# Altium PCB T-Type Converter.PcbDoc (part 4 of 4)
Units mil, origin at the board's own origin, x right, y up, seen from the top; angles counter-clockwise.
Board outline 14649.61 x 8960.63 mil, 2 copper layers (Top Layer, Bottom Layer), stack 64.8 mil thick; 214 components, 130 nets, 860 pads, 57 vias.
Unrouted connection lines stored in the file: 20.
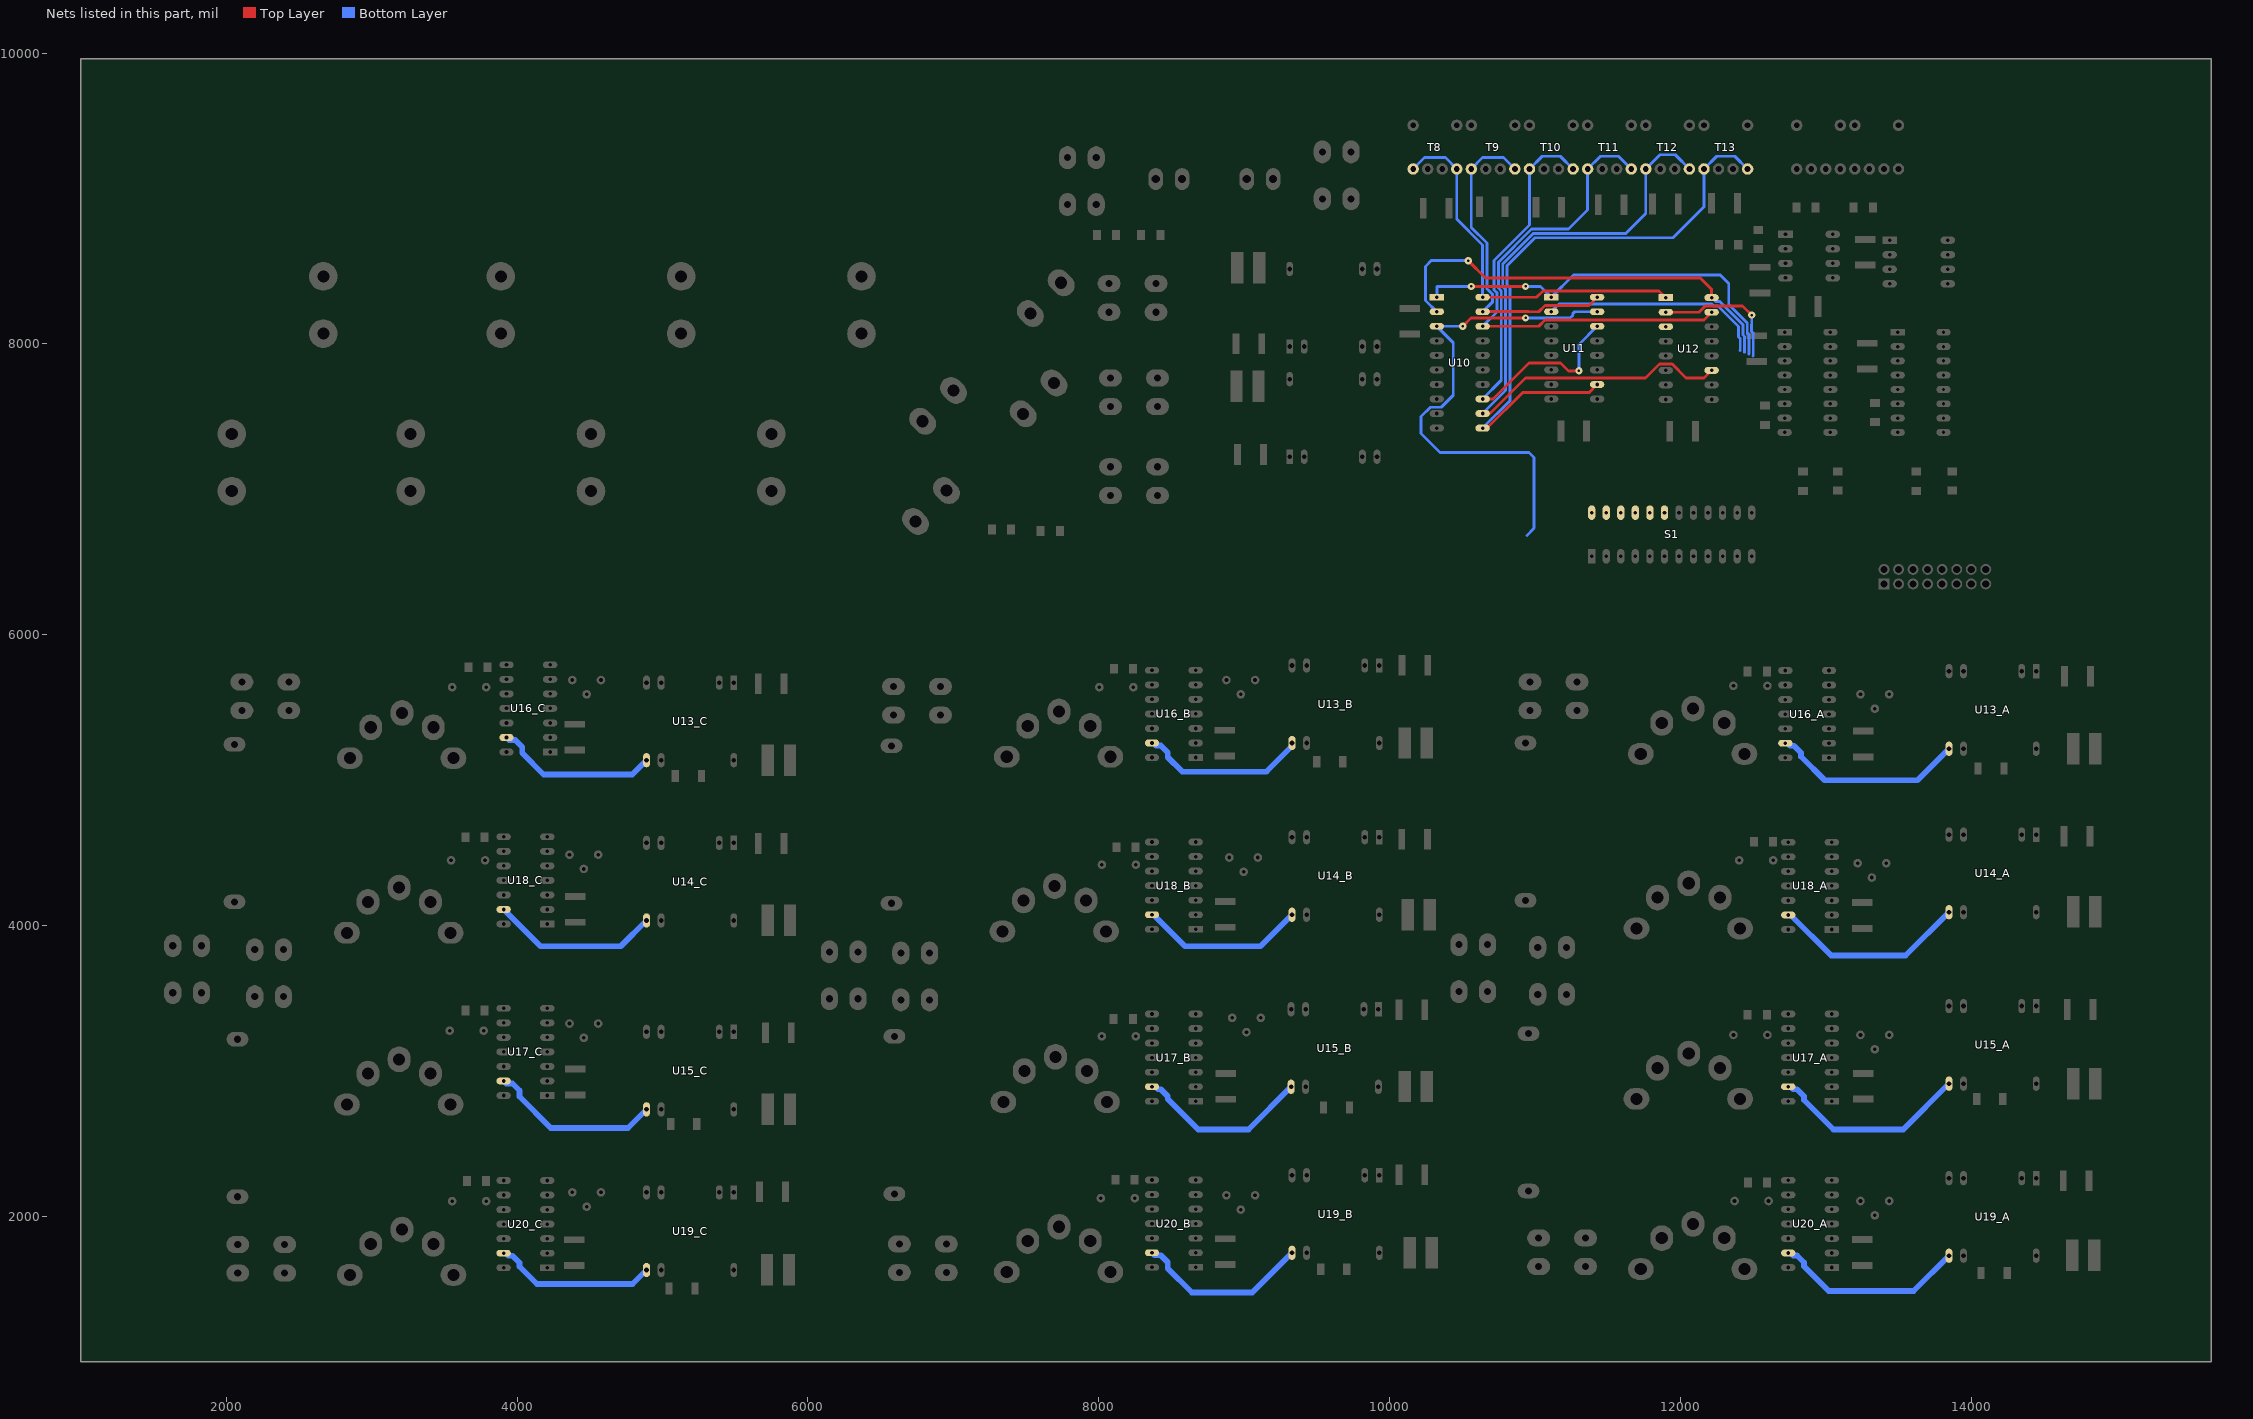
[diagram p3: the nets of this part, all layers, seen from the top]

## Via types
v1: diameter 50, hole 17, Top Layer to Bottom Layer, 25 vias
v2: diameter 80, hole 39, Top Layer to Bottom Layer, 17 vias
v3: diameter 50, hole 25, Top Layer to Bottom Layer, 13 vias
v4: diameter 50, hole 28, Top Layer to Bottom Layer, 2 vias

## Nets (pads, with @x,y where several pads share a name; then routed paths per layer and width w, separated by ;. In a path a pad name is that pad's centre, name@x,y a point inside that pad or via, vN(x,y) a via of type N, cw(c..) or ccw(c..) an arc to the next point about the centre after c; other vN are vias at no path point) (continued)
NetS1_19: S1.19 U10.3 U11.15 | length 3473.2
  Top Layer w19.68: v1(10503.54,8121.65) 10560.08,8178.19 10683.36,8178.19 10684.3,8179.13 v1(10935.04,8179.13)
  Bottom Layer w19.68: v1(10503.54,8121.65) U10.3@10324.8,8121.65 10437.85,8008.61 10437.85,7647.64 10355.33,7565.12 10281.21,7565.12 10216.69,7500.6 10216.69,7384.34 10347.41,7253.62 10958.98,7253.62 10993.11,7219.49 10993.11,7022.99 10994.09,7022 10994.09,6733.27 10943.9,6683.07 ; v1(10935.04,8179.13) 10935.98,8178.19 11241.67,8178.19 11259.05,8195.58 11259.05,8207.87 11272.83,8221.65 U11.15@11427.17,8221.65
NetS1_20: S1.20 U12.3
NetS1_21: S1.21 U11.2 | length 1563.6
  Bottom Layer w19.68: U11.2@11125.98,8207.87 U11.2@11112.2,8221.65 11165.59,8275.04 12216.05,8275.04 12229.12,8261.97 12258.16,8261.97 12400.32,8119.81 12400.32,8048.56 12411.42,8037.46 12411.42,7956.64 12410.16,7955.38
NetS1_22: S1.22 U10.2 U12.16 | length 2957.8
  Top Layer w19.68: v1(10541.34,8572.83) 10659.45,8454.72 12135.83,8454.72 12214.57,8375.99 U12.16@12214.57,8318.5 U12.16@12216.14,8316.93
  Bottom Layer w19.68: U10.2@10324.8,8221.65 10323.91,8221.65 10246.06,8299.5 10246.06,8533.46 10285.43,8572.83 v1(10541.34,8572.83) ; U12.16@12214.57,8318.5 12241.42,8291.65 12270.46,8291.65 12430,8132.11 12430,8060.86 12441.1,8049.75 12441.1,7944.34 12439.84,7943.08
NetS1_23: S1.23 U10.1 U11.1 | length 2742.6
  Top Layer w19.68: v1(10561.02,8395.67) v1(10935.04,8395.67)
  Bottom Layer w19.68: U10.1@10324.8,8321.65 10324.8,8395.67 v1(10561.02,8395.67) ; v1(10935.04,8395.67) 11038.19,8395.67 U11.1@11112.2,8321.65 11264.96,8474.41 12273.62,8474.41 12332.68,8415.35 12332.68,8271.41 12459.69,8144.41 12459.69,8073.15 12470.79,8062.05 12470.79,7932.04 12469.53,7930.78
NetS1_24: S1.24 U12.2 | length 920.5
  Top Layer w19.68: U12.2@11899.61,8218.5 12127.51,8218.5 12170.97,8261.97 12427.01,8261.97 v1(12490.16,8198.82)
  Bottom Layer w19.68: v1(12490.16,8198.82) 12490.16,8135.81 12489.37,8135.02 12489.37,8085.45 12500.47,8074.35 12500.47,7919.75 12499.21,7918.49
NetT8_1: T8.1 T8.4 U10.20 U12.1 | length 2617.3
  Top Layer w19.68: U10.20@10639.76,8321.65 11011.31,8321.65 11054.77,8365.12 11852.99,8365.12 U12.1@11899.61,8318.5
  Bottom Layer w19.68: T8.1@10161.81,9203.54 10239.76,9281.5 10383.86,9281.5 T8.4@10461.81,9203.54 10461.81,8859.06 10639.76,8681.1 U10.20@10639.76,8321.65
NetT9_1: T9.1 T9.4 U10.19 U11.16 | length 2291.1
  Top Layer w19.68: U10.19@10639.76,8221.65 10642.09,8223.98 10953.61,8223.98 10955.94,8221.65 11025.15,8221.65 11068.61,8265.12 11370.63,8265.12 U11.16@11427.17,8321.65
  Bottom Layer w19.68: U10.19@10639.76,8221.65 10708.82,8290.71 10708.82,8339.66 10679.13,8369.34 10669.45,8379.03 10669.45,8693.4 10561.81,8801.04 T9.1@10561.81,9203.54 10639.76,9281.5 10783.86,9281.5 T9.4@10861.81,9203.54 ; U11.16@11402.76,8321.65 U11.16@11427.17,8321.65
NetT10_1: T10.1 T10.4 U10.18 U12.15 | length 3219.5
  Top Layer w19.68: U10.18@10639.76,8121.65 11025.15,8121.65 11068.61,8165.12 12161.18,8165.12 U12.15@12214.57,8218.5
  Bottom Layer w19.68: U10.18@10639.76,8121.65 10738.5,8220.39 10738.5,8351.95 10718.5,8371.95 10718.5,8574.41 10961.81,8817.72 T10.1@10961.81,9203.54 11049.61,9291.34 11174.02,9291.34 T10.4@11261.81,9203.54
NetT11_1: T11.1 T11.4 U10.13 U11.14 | length 3564.5
  Top Layer w19.68: U10.13@10639.76,7621.65 10712.2,7621.65 10958.66,7868.11 11176.18,7868.11 11229.33,7814.96 v1(11302.17,7814.96)
  Bottom Layer w19.68: U10.13@10639.76,7621.65 10768.19,7750.08 10768.19,8364.25 10748.19,8384.25 10748.19,8537.52 10748.19,8562.11 10975.6,8789.53 11230.47,8789.53 11361.81,8920.87 T11.1@11361.81,9203.54 11449.61,9291.34 11574.02,9291.34 T11.4@11661.81,9203.54 ; v1(11302.17,7814.96) 11302.17,7996.65 U11.14@11427.17,8121.65
NetT12_1: T12.1 T12.4 U10.12 U12.11 | length 4694.2
  Top Layer w19.68: U10.12@10639.76,7521.65 10690.94,7521.65 10935.04,7765.75 11759.79,7765.75 11856.01,7861.97 11943.2,7861.97 12039.42,7765.75 12161.81,7765.75 U12.11@12214.57,7818.5
  Bottom Layer w19.68: U10.12@10639.76,7521.65 10797.87,7679.76 10797.87,8376.54 10777.87,8396.54 10777.87,8549.82 10987.9,8759.84 11624.02,8759.84 11761.81,8897.64 T12.1@11761.81,9203.54 11859.45,9301.18 11964.17,9301.18 T12.4@12061.81,9203.54
NetT13_1: T13.1 T13.4 U10.11 U11.10 | length 4268.9
  Top Layer w19.68: U10.11@10639.76,7421.65 10669.69,7421.65 10915.35,7667.32 11372.84,7667.32 U11.10@11427.17,7721.65
  Bottom Layer w19.68: U10.11@10639.76,7421.65 10827.56,7609.45 10827.56,8388.84 10807.56,8408.84 10807.56,8537.52 11000.19,8730.16 11948.66,8730.16 12161.81,8943.31 T13.1@12161.81,9203.54 12249.61,9291.34 12374.02,9291.34 T13.4@12461.81,9203.54
NetU13_A_8: U13_A.8 U16_A.13 | length 1335.7
  Bottom Layer w39.37: U16_A.13@12721.65,5254.33 12737.79,5254.33 12755.12,5237.01 12781.49,5237.01 12829.92,5188.58 12829.92,5162.2 12992.13,5000 13630.31,5000 U13_A.8@13846.85,5216.54
NetU13_B_8: U13_B.8 U16_B.13 | length 1157.1
  Bottom Layer w39.37: U16_B.13@8366.14,5255.91 8376.97,5255.91 8394.29,5238.58 8425.98,5238.58 8474.41,5190.15 8474.41,5158.46 8573.82,5059.06 9153.54,5059.06 9329.13,5234.65 U13_B.8@9329.13,5255.91
NetU13_C_8: U13_C.8 U16_C.13 | length 1132.5
  Bottom Layer w39.37: U16_C.13@3928.14,5293.7 3945.47,5276.38 3987,5276.38 4035.43,5227.95 4035.43,5186.41 4182.47,5039.37 4791.73,5039.37 U13_C.8@4890.16,5137.8
NetU14_A_8: U14_A.8 U18_A.13 | length 1344.9
  Bottom Layer w39.37: U18_A.13@12741.34,4073.23 12757.48,4073.23 13036.82,3793.89 13548.22,3793.89 U14_A.8@13846.85,4092.52
NetU14_B_8: U14_B.8 U18_B.13 | length 1142.4
  Bottom Layer w39.37: U18_B.13@8366.14,4074.8 8376.97,4074.8 8593.5,3858.27 9112.6,3858.27 U14_B.8@9329.13,4074.8
NetU14_C_8: U14_C.8 U18_C.13 | length 1159.8
  Bottom Layer w39.37: U18_C.13@3908.46,4111.02 4161.21,3858.27 4712.99,3858.27 U14_C.8@4890.16,4035.43
NetU15_A_8: U15_A.8 U17_A.13 | length 1372.5
  Bottom Layer w39.37: U17_A.13@12741.34,2892.13 12758.46,2892.13 12775.79,2874.8 12801.18,2874.8 12849.61,2826.37 12849.61,2800.98 13052.16,2598.43 13531.89,2598.43 U15_A.8@13846.85,2913.39
NetU15_B_8: U15_B.8 U17_B.13 | length 1210.6
  Bottom Layer w39.37: U17_B.13@8366.14,2892.13 8390.35,2892.13 8407.68,2874.8 8425.98,2874.8 8474.41,2826.37 8474.41,2808.07 8684.05,2598.43 9029.53,2598.43 U15_B.8@9322.83,2891.73
NetU15_C_8: U15_C.8 U17_C.13 | length 1192.9
  Bottom Layer w39.37: U17_C.13@3908.46,2931.5 3925.78,2914.17 3967.32,2914.17 4015.75,2865.74 4015.75,2824.21 4231.69,2608.27 4762.2,2608.27 U15_C.8@4890.16,2736.22
NetU19_A_8: U19_A.8 U20_A.13 | length 1329.7
  Bottom Layer w39.37: U20_A.13@12741.34,1748.82 12758.07,1748.82 12775.39,1731.5 12801.18,1731.5 12849.61,1683.07 12849.61,1657.28 13019.69,1487.2 13603.74,1487.2 U19_A.8@13846.85,1730.32
NetU19_B_8: U19_B.8 U20_B.13 | length 1214.7
  Bottom Layer w39.37: U20_B.13@8366.14,1750.39 8383.47,1733.07 8425.98,1733.07 8474.41,1684.64 8474.41,1642.13 8640.16,1476.38 9055.51,1476.38 U19_B.8@9329.13,1750
NetU19_C_8: U19_C.8 U20_C.13 | length 1124
  Bottom Layer w39.37: U20_C.13@3908.46,1747.24 3925,1747.24 3942.32,1729.92 3967.32,1729.92 4015.75,1681.49 4015.75,1656.5 4136.81,1535.43 4793.7,1535.43 U19_C.8@4890.16,1631.89
pads on no net: *1_A.1@11697.83,2809.06 *3_A.1@11727.36,5181.1 *4_A.1@11727.36,1637.8 R14_A.3 R14_B.3 R14_C.3 R15_A.3 R15_B.3 R15_C.3 R16_A.3 R16_B.3 R16_C.3 R20_A.3 R20_B.3 R20_C.3 T6.3 T6.4 T6.5 T6.8 T7.3 T7.4 T7.5 T7.8 T8.5 T8.8 T9.5 T9.8 T10.5 T10.8 T11.5 T11.8 T12.5 T12.8 T13.5 T13.8 U5.6 U5.7 U6.1 U6.2 U6.3 U6.10 U6.13 U6.14 U6.15 U8.1 U8.2 U8.3 U8.10 U8.13 U8.14 U8.15 U9.5 U9.6 U9.7 U10.14 U10.17 U11.7 U11.8 U11.9 U12.7 U12.8 U12.9 U13_A.6 U13_A.7 U13_B.6 U13_B.7 U13_C.6 U13_C.7 U14_A.6 U14_A.7 U14_B.6 U14_B.7 U14_C.6 U14_C.7 U15_A.6 U15_A.7 U15_B.6 U15_B.7 U15_C.6 U15_C.7 U16_A.7 U16_A.8 U16_A.9 U16_A.10 U16_A.14 U16_B.7 U16_B.8 U16_B.9 U16_B.10 U16_B.14 U16_C.7 U16_C.8 U16_C.9 U16_C.10 U16_C.14 U17_A.7 U17_A.8 U17_A.9 U17_A.10 U17_A.14 U17_B.7 U17_B.8 U17_B.9 U17_B.10 U17_B.14 U17_C.7 U17_C.8 U17_C.9 U17_C.10 U17_C.14 U18_A.7 U18_A.8 U18_A.9 U18_A.10 U18_A.14 U18_B.7 U18_B.8 U18_B.9 U18_B.10 U18_B.14 U18_C.7 U18_C.8 U18_C.9 U18_C.10 U18_C.14 U19_A.6 U19_A.7 U19_B.6 U19_B.7 U19_C.6 U19_C.7 U20_A.7 U20_A.8 U20_A.9 U20_A.10 U20_A.14 U20_B.7 U20_B.8 U20_B.9 U20_B.10 U20_B.14 U20_C.7 U20_C.8 U20_C.9 U20_C.10 U20_C.14

## Polygon pours and split planes (outlines as drawn)
NetC27_C_1 on Top Layer "Top Layer-No Net" (solid, pour order 438): 3120.08,5482.28 cw(c3198.82,5482.28) 3198.82,5561.02 3257.87,5561.02 cw(c3257.87,5501.97) 3316.93,5501.97 3316.93,4745.67 cw(c3216.93,4745.67) 3216.93,4645.67 2048.82,4645.67 cw(c2048.82,4745.67) 1948.82,4745.67 1948.82,5687.4 cw(c2048.82,5687.4) 2048.82,5787.4 2478.74,5787.4 cw(c2478.74,5687.4) 2578.74,5687.4 2578.74,5139.37 ccw(c2678.74,5139.37) 2678.74,5039.37 2872.44,5039.37 ccw(c2872.44,5139.37) 2972.44,5139.37 2972.44,5147.64 cw(c3061.02,5147.64) 3061.02,5236.22 ccw(c3061.02,5295.28) 3120.08,5295.28
NetC30_B_1 on Top Layer "Top Layer-No Net" (solid, pour order 460): 7557.54,2292.9 6143.31,2292.9 cw(c6143.31,2392.9) 6043.31,2392.9 6043.31,6199.21 7598.43,6199.21 7598.43,5375.59 cw(c7498.43,5375.59) 7498.43,5275.59 7285.04,5275.59 cw(c7285.04,5375.59) 7185.04,5375.59 7185.04,5775.98 ccw(c7085.04,5775.98) 7085.04,5875.98 6517.32,5875.98 ccw(c6517.32,5775.98) 6417.32,5775.98 6417.32,4104.33 ccw(c6496.06,4104.33) 6496.06,4025.59 cw(c6496.06,3966.54) 6555.12,3966.54 6555.12,3435.04 cw(c6476.38,3435.04) 6476.38,3356.3 ccw(c6476.38,3316.93) 6437.01,3316.93 6437.01,3210.24 ccw(c6537.01,3210.24) 6537.01,3110.24 7472.52,3110.24
NetC30_C_1 on Top Layer "Top Layer-No Net" (solid, pour order 436): 3049.67,2273.21 1635.43,2273.21 cw(c1635.43,2373.21) 1535.43,2373.21 1535.43,6179.53 3090.55,6179.53 3090.55,5355.91 cw(c2990.55,5355.91) 2990.55,5255.91 2777.17,5255.91 cw(c2777.17,5355.91) 2677.17,5355.91 2677.17,5756.3 ccw(c2577.17,5756.3) 2577.17,5856.3 2009.45,5856.3 ccw(c2009.45,5756.3) 1909.45,5756.3 1909.45,4084.65 ccw(c1988.19,4084.65) 1988.19,4005.91 cw(c1988.19,3946.85) 2047.24,3946.85 2047.24,3415.35 cw(c1968.5,3415.35) 1968.5,3336.61 ccw(c1968.5,3297.24) 1929.13,3297.24 1929.13,3190.55 ccw(c2029.13,3190.55) 2029.13,3090.55 2964.65,3090.55
NetC37_B_1 on Top Layer "Top Layer-No Net" (solid, pour order 364): 7598.43,1458.27 cw(c7498.43,1458.27) 7498.43,1358.27 6133.46,1358.27 cw(c6133.46,1458.27) 6033.46,1458.27 6033.46,2163.78 cw(c6133.46,2163.78) 6133.46,2263.78 7498.43,2263.78 cw(c7498.43,2163.78) 7598.43,2163.78
NetQ2_B_2 on Top Layer "Top Layer-No Net" (solid, pour order 380): 7714.48,3011.81 ccw(c7714.48,3111.81) 7785.19,3041.1 7884.1,3140 ccw(c7813.39,3210.71) 7913.39,3210.71 7913.39,3984.17 ccw(c7813.39,3984.17) 7884.1,4054.88 7814.96,4124.02 cw(c7838.72,4147.78) 7805.12,4147.78 7805.12,4281.5 ccw(c7706.69,4281.5) 7706.69,4379.92 7696.85,4379.92 ccw(c7696.85,4281.5) 7598.43,4281.5 7598.43,3111.81 ccw(c7698.43,3111.81) 7698.43,3011.81
NetQ2_C_2 on Top Layer "Top Layer-No Net" (solid, pour order 390): 3206.61,2992.13 ccw(c3206.61,3092.13) 3277.32,3021.42 3376.22,3120.32 ccw(c3305.51,3191.03) 3405.51,3191.03 3405.51,3964.48 ccw(c3305.51,3964.48) 3376.22,4035.19 3307.09,4104.33 cw(c3330.85,4128.09) 3297.24,4128.09 3297.24,4261.81 ccw(c3198.82,4261.81) 3198.82,4360.24 3188.98,4360.24 ccw(c3188.98,4261.81) 3090.55,4261.81 3090.55,3092.13 ccw(c3190.55,3092.13) 3190.55,2992.13
NetC37_C_1 on Top Layer "Top Layer-No Net" (solid, pour order 384): 3090.55,1438.58 cw(c2990.55,1438.58) 2990.55,1338.58 1625.59,1338.58 cw(c1625.59,1438.58) 1525.59,1438.58 1525.59,2144.09 cw(c1625.59,2144.09) 1625.59,2244.09 2990.55,2244.09 cw(c2990.55,2144.09) 3090.55,2144.09
NetC30_C_1 on Top Layer "Top Layer-No Net" (solid, pour order 382): 3226.3,1801.18 ccw(c3226.3,1901.18) 3297.01,1830.47 3405.75,1939.21 ccw(c3335.04,2009.92) 3435.04,2009.93 3435.04,2655.43 ccw(c3335.04,2655.43) 3405.75,2726.14 3041.34,3090.55 2964.65,3090.55 ccw(c2964.65,2990.55) 2893.94,3061.26 2893.46,3060.79 ccw(c2964.17,2990.08) 2864.17,2990.07 2864.17,2942.91 ccw(c2935.46,2942.91) 2885.05,2892.51 2952.99,2824.56 cw(c2882.29,2753.85) 2982.28,2753.85 2982.28,2332.68 ccw(c3041.34,2332.68) 3041.34,2273.62 cw(c3041.34,2188.67) 3126.3,2188.67 3126.3,1901.18 ccw(c3217.48,1892.36) 3208.66,1801.18
NetC1_1 on Top Layer "Top Layer-No Net" (solid, pour order 344): 1881.5,7627.95 ccw(c1881.5,7527.95) 1781.5,7527.95 1781.5,6802.76 ccw(c1881.5,6802.76) 1881.5,6702.76 6503.85,6702.76 cw(c6503.85,6602.76) 6574.56,6673.47 6609.25,6638.78 ccw(c6752.92,6767.19) 6742.13,6574.8 6860.24,6574.8 ccw(c6849.45,6767.18) 6993.11,6638.78 7126.22,6771.89 ccw(c7055.51,6842.6) 7155.51,6842.6 7155.51,6917.24 ccw(c7055.52,6917.24) 7126.22,6987.95 6968.27,7145.91 ccw(c6897.56,7075.21) 6897.55,7175.2 6438.58,7175.2 cw(c6438.58,7275.2) 6338.58,7275.2 6338.58,7527.95 ccw(c6238.58,7527.95) 6238.58,7627.95
NetC2_2 on Top Layer "Top Layer-No Net" (solid, pour order 346): 2481.89,8750 ccw(c2481.89,8650) 2381.89,8650 2381.89,7865.75 ccw(c2481.89,7865.75) 2481.89,7765.75 6543.7,7765.75 ccw(c6543.7,7865.75) 6643.7,7865.75 6643.7,8208.66 cw(c6722.44,8208.66) 6722.44,8287.4 7222.36,8287.4 cw(c7222.36,8187.4) 7293.07,8258.11 7470.71,8080.47 ccw(c7541.42,8151.18) 7541.42,8051.18 7625.9,8051.18 ccw(c7625.9,8151.18) 7696.61,8080.47 7854.57,8238.43 ccw(c7783.86,8309.14) 7883.86,8309.14 7883.86,8383.78 ccw(c7783.86,8383.78) 7854.57,8454.49 7588.34,8720.71 ccw(c7517.63,8650) 7517.63,8750
NetF2_1 on Top Layer "Top Layer-No Net" (solid, pour order 350): 8523.86,8444.64 ccw(c8415.35,8444.64) 8415.35,8553.15 8052.76,8553.15 ccw(c8052.76,8453.15) 7952.76,8453.15 7952.76,8279.61 cw(c7852.76,8279.61) 7923.47,8208.9 7726.14,8011.57 cw(c7655.43,8082.28) 7655.43,7982.28 7521.74,7982.28 ccw(c7521.73,7882.29) 7451.03,7952.99 7293.07,7795.04 ccw(c7363.78,7724.33) 7263.78,7724.33 7263.78,7600.48 ccw(c7363.78,7600.48) 7293.07,7529.77 7431.34,7391.49 ccw(c7502.05,7462.21) 7502.05,7362.2 7576.69,7362.2 ccw(c7576.69,7462.2) 7647.4,7391.49 7864.41,7608.51 ccw(c7793.7,7679.22) 7893.7,7679.22 7893.7,7704.64 cw(c7993.7,7704.64) 7922.99,7775.35 8234.11,8086.47 cw(c8267.72,8052.87) 8267.72,8100.39 8415.35,8100.39 ccw(c8415.35,8208.9) 8523.86,8208.9
NetF1_1 on Top Layer "Top Layer-No Net" (solid, pour order 352): 7767.32,9429.13 ccw(c7767.32,9329.13) 7667.32,9329.13 7667.32,8918.9 ccw(c7767.32,8918.9) 7767.32,8818.9 8659.84,8818.9 ccw(c8659.84,8918.9) 8759.84,8918.9 8759.84,9329.13 ccw(c8659.84,9329.13) 8659.84,9429.13
48V on Top Layer "Top Layer-No Net" (solid, pour order 64): 8809.06,7204.72 ccw(c8848.43,7204.72) 8848.43,7165.35 8868.11,7165.35 ccw(c8868.11,7204.72) 8907.48,7204.72 8907.48,8937.01 ccw(c8868.11,8937.01) 8868.11,8976.38 ccw(c8868.11,8917.32) 8809.06,8917.32
48V on Top Layer "Top Layer-No Net" (solid, pour order 354): 9240.55,8927.17 ccw(c9240.55,9027.17) 9340.55,9027.17 9340.55,9279.92 ccw(c9240.55,9279.92) 9240.55,9379.92 8909.06,9379.92 ccw(c8909.06,9279.92) 8809.06,9279.92 8809.06,8858.27 ccw(c8858.27,8858.27) 8858.27,8809.06 8946.85,8809.06 ccw(c8946.85,8868.11) 9005.91,8868.11 9005.91,8877.95 cw(c9055.12,8877.95) 9055.12,8927.17
NetF3_2 on Top Layer "Top Layer-No Net" (solid, pour order 348): 8454.72,6791.34 ccw(c8449.8,6884.84) 8543.31,6889.76 8543.31,7194.88 ccw(c8454.73,7204.72) 8464.57,7293.31 7502.05,7293.31 cw(c7502.05,7393.31) 7431.34,7322.6 7234.01,7519.92 cw(c7304.73,7590.63) 7204.72,7590.63 7204.72,7625.9 ccw(c7104.73,7625.9) 7175.44,7696.61 7016.03,7856.02 ccw(c6948.82,7788.82) 6948.82,7883.86 6881.97,7883.86 ccw(c6881.97,7783.86) 6811.26,7854.57 6623.78,7667.08 ccw(c6694.48,7596.38) 6594.49,7596.37 6594.49,7492.21 ccw(c6694.49,7492.21) 6623.78,7421.5 6742.36,7302.91 ccw(c6813.08,7373.62) 6813.07,7273.62 6946.77,7273.62 cw(c6946.77,7173.63) 7017.48,7244.33 7441.18,6820.63 ccw(c7511.89,6891.34) 7511.89,6791.34
GND on Top Layer "Top Layer-No Net" (solid, pour order 426): 3063.27,3220.01 cw(c2963.27,3220.01) 2963.27,3120.01 2070.75,3120.01 cw(c2070.75,3220.01) 1970.75,3220.01 1970.75,3247.97 1970.75,4123.73 1970.75,4496.39 cw(c2070.75,4496.39) 2070.75,4596.39 3417.6,4596.39 cw(c3417.6,4527.49) 3486.5,4527.49 3486.5,4489.7 cw(c3386.5,4489.7) 3386.5,4389.7 3112.48,4389.7 ccw(c3112.48,4340.49) 3063.27,4340.49
NetC27_B_1 on Top Layer "Top Layer-No Net" (solid, pour order 456): 7618.11,5501.97 cw(c7696.85,5501.97) 7696.85,5580.71 7755.91,5580.71 cw(c7755.91,5521.65) 7814.96,5521.65 7814.96,4765.35 cw(c7714.96,4765.35) 7714.96,4665.35 6546.85,4665.35 cw(c6546.85,4765.35) 6446.85,4765.35 6446.85,5707.09 cw(c6546.85,5707.09) 6546.85,5807.09 6976.77,5807.09 cw(c6976.77,5707.09) 7076.77,5707.09 7076.77,5159.06 ccw(c7176.77,5159.06) 7176.77,5059.06 7370.47,5059.06 ccw(c7370.47,5159.06) 7470.47,5159.06 7470.47,5167.32 cw(c7559.06,5167.32) 7559.06,5255.91 ccw(c7559.06,5314.96) 7618.11,5314.96
GND on Top Layer "Top Layer-No Net" (solid, pour order 458): 7561.3,3239.7 cw(c7461.3,3239.7) 7461.3,3139.7 6568.78,3139.7 cw(c6568.78,3239.7) 6468.78,3239.7 6468.78,3267.65 6468.78,4515.77 cw(c6568.78,4516.08) 6568.78,4616.08 7915.63,4616.08 cw(c7915.63,4547.18) 7984.53,4547.18 7984.53,4509.38 cw(c7884.53,4509.38) 7884.53,4409.38 7610.51,4409.38 ccw(c7610.51,4360.17) 7561.3,4360.17
NetC27_A_1 on Top Layer "Top Layer-No Net" (solid, pour order 470): 11978.35,5521.65 cw(c12057.09,5521.65) 12057.09,5600.39 12116.14,5600.39 cw(c12116.14,5541.34) 12175.2,5541.34 12175.2,4785.04 cw(c12075.2,4785.04) 12075.2,4685.04 10907.09,4685.04 cw(c10907.09,4785.04) 10807.09,4785.04 10807.09,5726.77 cw(c10907.09,5726.77) 10907.09,5826.77 11337.01,5826.77 cw(c11337.01,5726.77) 11437.01,5726.77 11437.01,5178.74 ccw(c11537.01,5178.74) 11537.01,5078.74 11730.71,5078.74 ccw(c11730.71,5178.74) 11830.71,5178.74 11830.71,5187.01 cw(c11919.29,5187.01) 11919.29,5275.59 ccw(c11919.29,5334.65) 11978.35,5334.65
NetQ2_A_2 on Top Layer "Top Layer-No Net" (solid, pour order 472): 12074.72,3031.5 ccw(c12074.72,3131.5) 12145.43,3060.79 12244.33,3159.69 ccw(c12173.62,3230.4) 12273.62,3230.4 12273.62,4003.85 ccw(c12173.62,4003.85) 12244.33,4074.56 12175.2,4143.7 cw(c12198.96,4167.46) 12165.35,4167.46 12165.35,4301.18 ccw(c12066.93,4301.18) 12066.93,4399.61 12057.09,4399.61 ccw(c12057.09,4301.18) 11958.66,4301.18 11958.66,3131.5 ccw(c12058.66,3131.5) 12058.66,3031.5
NetC37_A_1 on Top Layer "NETC37_A_1_L01_P474" (solid, pour order 474): 11958.66,1477.95 cw(c11858.66,1477.95) 11858.66,1377.95 10493.7,1377.95 cw(c10493.7,1477.95) 10393.7,1477.95 10393.7,2183.46 cw(c10493.7,2183.46) 10493.7,2283.46 11858.66,2283.46 cw(c11858.66,2183.46) 11958.66,2183.46
NetC30_A_1 on Top Layer "Top Layer-No Net" (solid, pour order 476): 11917.78,2312.58 10503.54,2312.58 cw(c10503.54,2412.58) 10403.54,2412.58 10403.54,6218.9 11958.66,6218.9 11958.66,5395.28 cw(c11858.66,5395.28) 11858.66,5295.28 11645.28,5295.28 cw(c11645.28,5395.28) 11545.28,5395.28 11545.28,5795.67 ccw(c11445.28,5795.67) 11445.28,5895.67 10877.56,5895.67 ccw(c10877.56,5795.67) 10777.56,5795.67 10782.48,3986.22 10782.48,3358.12 cw(c10782.55,3357.21) 10783.46,3357.28 10783.46,3250.59 ccw(c10900.69,3247.15) 10897.24,3129.92 11832.76,3129.92
GND on Top Layer "Top Layer-No Net" (solid, pour order 468): 11921.54,3259.38 cw(c11821.54,3259.38) 11821.54,3159.38 10929.02,3159.38 cw(c10929.02,3259.38) 10829.02,3259.38 10829.02,3287.34 10829.02,4163.32 10829.02,4535.76 cw(c10929.02,4535.76) 10929.02,4635.76 12275.87,4635.76 cw(c12275.87,4566.86) 12344.76,4566.86 12344.76,4529.07 cw(c12244.76,4529.07) 12244.76,4429.07 11970.75,4429.07 ccw(c11970.75,4379.86) 11921.54,4379.86
NetC30_A_1 on Top Layer "Top Layer-No Net" (solid, pour order 478): 12094.41,1840.55 ccw(c12094.41,1940.55) 12165.12,1869.84 12273.86,1978.58 ccw(c12203.15,2049.29) 12303.15,2049.3 12303.15,2694.8 ccw(c12203.15,2694.8) 12273.86,2765.51 11909.45,3129.92 11832.76,3129.92 ccw(c11832.76,3029.92) 11762.05,3100.63 11761.57,3100.16 ccw(c11832.28,3029.45) 11732.28,3029.44 11732.28,2982.28 ccw(c11803.57,2982.28) 11753.16,2931.88 11821.1,2863.93 cw(c11750.4,2793.22) 11850.39,2793.22 11850.39,2372.05 ccw(c11909.45,2372.05) 11909.45,2312.99 cw(c11909.45,2228.04) 11994.41,2228.04 11994.41,1940.55 ccw(c12085.59,1931.73) 12076.77,1840.55
NetC30_B_1 on Top Layer "Top Layer-No Net" (solid, pour order 366): 7734.17,1820.87 ccw(c7734.17,1920.87) 7804.88,1850.16 7913.62,1958.9 ccw(c7842.91,2029.61) 7942.91,2029.61 7942.91,2675.11 ccw(c7842.91,2675.11) 7913.62,2745.82 7549.21,3110.24 7472.52,3110.24 ccw(c7472.52,3010.24) 7401.81,3080.95 7401.34,3080.47 ccw(c7472.05,3009.76) 7372.05,3009.76 7372.05,2962.6 ccw(c7443.33,2962.6) 7392.93,2912.19 7460.87,2844.25 cw(c7390.16,2773.54) 7490.16,2773.54 7490.16,2352.36 ccw(c7549.21,2352.36) 7549.21,2293.31 cw(c7549.21,2208.35) 7634.17,2208.35 7634.17,1920.87 ccw(c7725.35,1912.05) 7716.54,1820.87
48V on Top Layer "Top Layer-No Net" (solid, pour order 522): 9005.1,8858.27 9005.1,7146.32 ccw(c9105.1,7146.32) 9034.39,7075.61 9100.71,7009.29 ccw(c9171.42,7080) 9171.42,6980 9290,6980 9244.29,6934.29 cw(c9173.58,7005) 9173.58,6905 9001.42,6905 cw(c9001.42,7005) 8930.71,6934.29 8839.29,7025.71 cw(c8910,7096.42) 8810,7096.42 8810,8813.58 cw(c8910,8813.58) 8839.29,8884.29 8915,8960
GND on Bottom Layer "Top Layer-No Net" (solid, pour order 520): 11385,6735 11171.42,6735 ccw(c11171.42,6635) 11100.71,6705.71 11054.29,6659.29 cw(c10983.58,6730) 10983.58,6630 9996.42,6630 cw(c9996.42,6730) 9925.71,6659.29 9885,6700 9854.29,6669.29 ccw(c9925,6598.58) 9825,6598.58 9825,6310 11053.58,6310 ccw(c11053.58,6410) 11124.29,6339.29 11240,6455
GND on Bottom Layer "Top Layer-No Net" (solid, pour order 516): 9852.36,7003.61 9852.36,6775.67 ccw(c9952.36,6775.67) 9881.65,6704.96 10085.87,6500.75 ccw(c10156.58,6571.46) 10156.58,6471.46 10939.88,6471.46 ccw(c10939.88,6571.46) 11010.59,6500.75 11213.82,6703.98 cw(c11284.53,6633.27) 11284.53,6733.27 15632.79,6733.27 cw(c15632.79,6633.27) 15703.5,6703.98 15787.64,6619.84 cw(c15716.93,6549.13) 15816.93,6549.13 15816.93,5908.46 9879.02,5908.46 cw(c9879.02,6008.46) 9808.31,5937.75 9458.66,6287.4 9674.45,6503.19 ccw(c9603.74,6573.9) 9703.74,6573.9 9703.74,6942.91
GND on Bottom Layer "GND_LEGA" (solid, remove dead copper, pour order 510): 7801.18,1677.17 9675.2,1677.17 9675.2,6421.26 15957.68,6421.26 15957.68,388.78 7801.18,388.78 7801.18,1644.68
GND on Bottom Layer "Bottom Layer-GND" (solid, remove dead copper, pour order 514): 9401.57,9250.98 9401.57,9372.05 cw(c9480.32,9372.05) 9480.32,9450.79 9753.35,9450.79 cw(c9753.35,9350.79) 9853.35,9350.79 9853.35,9251.97 9853.35,8356.3 9718.5,8356.3 9401.57,8356.3 9401.57,9257.87
GND on Bottom Layer "Top Layer-No Net" (solid, remove dead copper, pour order 512): 2481.89,8750 ccw(c2481.89,8650) 2381.89,8650 2381.89,7727.95 cw(c2281.89,7727.95) 2281.89,7627.95 337.6,7627.95 337.6,6702.76 337.6,823.82 3146.65,823.82 3146.65,6702.76 6415.75,6702.76 ccw(c6415.75,6802.75) 6515.75,6802.76 6515.75,7183.46 cw(c6615.75,7183.46) 6615.75,7283.46 8541.73,7283.46 9853.35,7283.46 9853.35,8750 8541.74,8750 8541.74,7992.12 7127.56,7992.13 cw(c7127.56,8092.13) 7027.56,8092.13 7027.56,8650 ccw(c6927.56,8650) 6927.56,8750
GND on Bottom Layer "GND_LEGB" (solid, remove dead copper, pour order 506): 5258.86,1669.29 5258.86,7470.47 9852.36,7470.47 9852.36,552.17 3148.62,552.17 3148.62,1669.29 3685.04,1669.29
GND on Bottom Layer "GND_LEGC" (solid, remove dead copper, pour order 502): 3131.89,1693.9 3131.89,1332.68 3619.09,1332.68 5309.06,1332.68 5309.06,6800.2 3125.98,6800.2 3125.98,6347.44 3125.98,5590.55 3351.38,5590.55 3351.38,4565.94 3358.27,1678.15 3132.87,1678.15 3131.89,1795.28 3131.89,1677.17
NetC30_A_1 on Bottom Layer "Top Layer-No Net" (solid, pour order 490): 11917.78,2312.58 10503.54,2312.58 cw(c10503.54,2412.58) 10403.54,2412.58 10403.54,6218.9 11958.66,6218.9 11958.66,5395.28 cw(c11858.66,5395.28) 11858.66,5295.28 11645.28,5295.28 cw(c11645.28,5395.28) 11545.28,5395.28 11545.28,5795.67 ccw(c11445.28,5795.67) 11445.28,5895.67 10877.56,5895.67 ccw(c10877.56,5795.67) 10777.56,5795.67 10777.56,4124.02 ccw(c10856.3,4124.02) 10856.3,4045.28 cw(c10856.3,3986.22) 10915.35,3986.22 10915.35,3454.72 cw(c10836.61,3454.72) 10836.61,3375.98 ccw(c10836.61,3336.61) 10797.24,3336.61 10797.24,3229.92 ccw(c10897.24,3229.92) 10897.24,3129.92 11832.76,3129.92
NetC30_B_1 on Bottom Layer "Top Layer-No Net" (solid, pour order 466): 7557.54,2292.9 6143.31,2292.9 cw(c6143.31,2392.9) 6043.31,2392.9 6043.31,6199.21 7598.43,6199.21 7598.43,5375.59 cw(c7498.43,5375.59) 7498.43,5275.59 7285.04,5275.59 cw(c7285.04,5375.59) 7185.04,5375.59 7185.04,5775.98 ccw(c7085.04,5775.98) 7085.04,5875.98 6517.32,5875.98 ccw(c6517.32,5775.98) 6417.32,5775.98 6417.32,4104.33 ccw(c6496.06,4104.33) 6496.06,4025.59 cw(c6496.06,3966.54) 6555.12,3966.54 6555.12,3435.04 cw(c6476.38,3435.04) 6476.38,3356.3 ccw(c6476.38,3316.93) 6437.01,3316.93 6437.01,3210.24 ccw(c6537.01,3210.24) 6537.01,3110.24 7472.52,3110.24
NetC27_C_1 on Bottom Layer "Top Layer-No Net" (solid, pour order 454): 3120.08,5482.28 cw(c3198.82,5482.28) 3198.82,5561.02 3257.87,5561.02 cw(c3257.87,5501.97) 3316.93,5501.97 3316.93,4745.67 cw(c3216.93,4745.67) 3216.93,4645.67 2048.82,4645.67 cw(c2048.82,4745.67) 1948.82,4745.67 1948.82,5687.4 cw(c2048.82,5687.4) 2048.82,5787.4 2478.74,5787.4 cw(c2478.74,5687.4) 2578.74,5687.4 2578.74,5139.37 ccw(c2678.74,5139.37) 2678.74,5039.37 2872.44,5039.37 ccw(c2872.44,5139.37) 2972.44,5139.37 2972.44,5147.64 cw(c3061.02,5147.64) 3061.02,5236.22 ccw(c3061.02,5295.28) 3120.08,5295.28
NetC30_C_1 on Bottom Layer "Top Layer-No Net" (solid, pour order 422): 3226.3,1801.18 ccw(c3226.3,1901.18) 3297.01,1830.47 3405.75,1939.21 ccw(c3335.04,2009.92) 3435.04,2009.93 3435.04,2655.43 ccw(c3335.04,2655.43) 3405.75,2726.14 3041.34,3090.55 2964.65,3090.55 ccw(c2964.65,2990.55) 2893.94,3061.26 2893.46,3060.79 ccw(c2964.17,2990.08) 2864.17,2990.07 2864.17,2942.91 ccw(c2935.46,2942.91) 2885.05,2892.51 2952.99,2824.56 cw(c2882.29,2753.85) 2982.28,2753.85 2982.28,2332.68 ccw(c3041.34,2332.68) 3041.34,2273.62 cw(c3041.34,2188.67) 3126.3,2188.67 3126.3,1901.18 ccw(c3217.48,1892.36) 3208.66,1801.18
NetC30_C_1 on Bottom Layer "Top Layer-No Net" (solid, pour order 420): 3049.67,2273.21 1635.43,2273.21 cw(c1635.43,2373.21) 1535.43,2373.21 1535.43,6179.53 3090.55,6179.53 3090.55,5355.91 cw(c2990.55,5355.91) 2990.55,5255.91 2777.17,5255.91 cw(c2777.17,5355.91) 2677.17,5355.91 2677.17,5756.3 ccw(c2577.17,5756.3) 2577.17,5856.3 2009.45,5856.3 ccw(c2009.45,5756.3) 1909.45,5756.3 1909.45,4084.65 ccw(c1988.19,4084.65) 1988.19,4005.91 cw(c1988.19,3946.85) 2047.24,3946.85 2047.24,3415.35 cw(c1968.5,3415.35) 1968.5,3336.61 ccw(c1968.5,3297.24) 1929.13,3297.24 1929.13,3190.55 ccw(c2029.13,3190.55) 2029.13,3090.55 2964.65,3090.55
NetQ2_C_2 on Bottom Layer "Top Layer-No Net" (solid, pour order 404): 3206.61,2992.13 ccw(c3206.61,3092.13) 3277.32,3021.42 3376.22,3120.32 ccw(c3305.51,3191.03) 3405.51,3191.03 3405.51,3964.48 ccw(c3305.51,3964.48) 3376.22,4035.19 3307.09,4104.33 cw(c3330.85,4128.09) 3297.24,4128.09 3297.24,4261.81 ccw(c3198.82,4261.81) 3198.82,4360.24 3188.98,4360.24 ccw(c3188.98,4261.81) 3090.55,4261.81 3090.55,3092.13 ccw(c3190.55,3092.13) 3190.55,2992.13
NetC37_C_1 on Bottom Layer "Top Layer-No Net" (solid, pour order 406): 3090.55,1438.58 cw(c2990.55,1438.58) 2990.55,1338.58 1625.59,1338.58 cw(c1625.59,1438.58) 1525.59,1438.58 1525.59,2144.09 cw(c1625.59,2144.09) 1625.59,2244.09 2990.55,2244.09 cw(c2990.55,2144.09) 3090.55,2144.09
NetC37_B_1 on Bottom Layer "Top Layer-No Net" (solid, pour order 362): 7598.43,1458.27 cw(c7498.43,1458.27) 7498.43,1358.27 6133.46,1358.27 cw(c6133.46,1458.27) 6033.46,1458.27 6033.46,2163.78 cw(c6133.46,2163.78) 6133.46,2263.78 7498.43,2263.78 cw(c7498.43,2163.78) 7598.43,2163.78
NetC30_B_1 on Bottom Layer "Top Layer-No Net" (solid, pour order 236): 7734.17,1820.87 ccw(c7734.17,1920.87) 7804.88,1850.16 7913.62,1958.9 ccw(c7842.91,2029.61) 7942.91,2029.61 7942.91,2675.11 ccw(c7842.92,2675.11) 7913.62,2745.82 7549.21,3110.24 7472.52,3110.24 ccw(c7472.52,3010.24) 7401.81,3080.95 7401.34,3080.47 ccw(c7472.05,3009.76) 7372.05,3009.76 7372.05,2962.6 ccw(c7443.33,2962.6) 7392.93,2912.19 7460.87,2844.25 cw(c7390.16,2773.54) 7490.16,2773.54 7490.16,2352.36 ccw(c7549.21,2352.36) 7549.21,2293.31 cw(c7549.21,2208.35) 7634.17,2208.35 7634.17,1920.87 ccw(c7725.35,1912.05) 7716.54,1820.87
NetC30_B_1 on Bottom Layer "Top Layer-No Net" (solid, pour order 242): 7391.73,5275.59 7285.04,5275.59 cw(c7285.04,5375.59) 7185.04,5375.59 7185.04,5482.28
NetQ2_B_2 on Bottom Layer "Top Layer-No Net" (solid, pour order 244): 7714.48,3011.81 ccw(c7714.48,3111.81) 7785.19,3041.1 7884.1,3140 ccw(c7813.39,3210.71) 7913.39,3210.71 7913.39,3984.17 ccw(c7813.39,3984.17) 7884.1,4054.88 7814.96,4124.02 cw(c7838.72,4147.78) 7805.12,4147.78 7805.12,4281.5 ccw(c7706.69,4281.5) 7706.69,4379.92 7696.85,4379.92 ccw(c7696.85,4281.5) 7598.43,4281.5 7598.43,3111.81 ccw(c7698.43,3111.81) 7698.43,3011.81
GND on Bottom Layer "Top Layer-No Net" (solid, pour order 416): 3061.02,3220.08 cw(c2961.02,3220.08) 2961.02,3120.08 2068.5,3120.08 cw(c2068.5,3220.08) 1968.5,3220.08 1968.5,3248.03 1968.5,4123.79 1968.5,4496.46 cw(c2068.5,4496.46) 2068.5,4596.46 3415.35,4596.46 cw(c3415.35,4527.56) 3484.25,4527.56 3484.25,4489.76 cw(c3384.25,4489.76) 3384.25,4389.76 3110.24,4389.76 ccw(c3110.23,4340.55) 3061.02,4340.55
GND on Bottom Layer "Top Layer-No Net" (solid, pour order 480): 11920.86,3259.45 cw(c11820.86,3259.45) 11820.86,3159.45 10928.34,3159.45 cw(c10928.34,3259.45) 10828.34,3259.45 10828.34,3287.4 10828.34,4163.16 10828.34,4535.83 cw(c10928.34,4535.83) 10928.34,4635.83 12275.19,4635.83 cw(c12275.19,4566.93) 12344.09,4566.93 12344.09,4529.13 cw(c12244.09,4529.13) 12244.09,4429.13 11970.07,4429.13 ccw(c11970.07,4379.92) 11920.86,4379.92
NetC27_A_1 on Bottom Layer "Top Layer-No Net" (solid, pour order 482): 11978.35,5521.65 cw(c12057.09,5521.65) 12057.09,5600.39 12116.14,5600.39 cw(c12116.14,5541.34) 12175.2,5541.34 12175.2,4785.04 cw(c12075.2,4785.04) 12075.2,4685.04 10907.09,4685.04 cw(c10907.09,4785.04) 10807.09,4785.04 10807.09,5726.77 cw(c10907.09,5726.77) 10907.09,5826.77 11337.01,5826.77 cw(c11337.01,5726.77) 11437.01,5726.77 11437.01,5178.74 ccw(c11537.01,5178.74) 11537.01,5078.74 11730.71,5078.74 ccw(c11730.71,5178.74) 11830.71,5178.74 11830.71,5187.01 cw(c11919.29,5187.01) 11919.29,5275.59 ccw(c11919.29,5334.65) 11978.35,5334.65
NetQ2_A_2 on Bottom Layer "Top Layer-No Net" (solid, pour order 484): 12074.72,3031.5 ccw(c12074.72,3131.5) 12145.43,3060.79 12244.33,3159.69 ccw(c12173.62,3230.4) 12273.62,3230.4 12273.62,4003.85 ccw(c12173.62,4003.85) 12244.33,4074.56 12175.2,4143.7 cw(c12198.96,4167.46) 12165.35,4167.46 12165.35,4301.18 ccw(c12066.93,4301.18) 12066.93,4399.61 12057.09,4399.61 ccw(c12057.09,4301.18) 11958.66,4301.18 11958.66,3131.5 ccw(c12058.66,3131.5) 12058.66,3031.5
NetC30_A_1 on Bottom Layer "Top Layer-No Net" (solid, pour order 486): 12094.41,1840.55 ccw(c12094.41,1940.55) 12165.12,1869.84 12273.86,1978.58 ccw(c12203.15,2049.29) 12303.15,2049.3 12303.15,2694.8 ccw(c12203.15,2694.8) 12273.86,2765.51 11909.45,3129.92 11832.76,3129.92 ccw(c11832.76,3029.92) 11762.05,3100.63 11761.57,3100.16 ccw(c11832.28,3029.45) 11732.28,3029.44 11732.28,2982.28 ccw(c11803.57,2982.28) 11753.16,2931.88 11821.1,2863.93 cw(c11750.4,2793.23) 11850.39,2793.22 11850.39,2372.05 ccw(c11909.45,2372.05) 11909.45,2312.99 cw(c11909.45,2228.04) 11994.41,2228.04 11994.41,1940.55 ccw(c12085.59,1931.73) 12076.77,1840.55
NetC37_A_1 on Bottom Layer "Top Layer-No Net" (solid, pour order 488): 11958.66,1477.95 cw(c11858.66,1477.95) 11858.66,1377.95 10493.7,1377.95 cw(c10493.7,1477.95) 10393.7,1477.95 10393.7,2183.46 cw(c10493.7,2183.46) 10493.7,2283.46 11858.66,2283.46 cw(c11858.66,2183.46) 11958.66,2183.46
NetC27_B_1 on Bottom Layer "Top Layer-No Net" (solid, pour order 462): 7618.11,5501.97 cw(c7696.85,5501.97) 7696.85,5580.71 7755.91,5580.71 cw(c7755.91,5521.65) 7814.96,5521.65 7814.96,4765.35 cw(c7714.96,4765.35) 7714.96,4665.35 6546.85,4665.35 cw(c6546.85,4765.35) 6446.85,4765.35 6446.85,5707.09 cw(c6546.85,5707.09) 6546.85,5807.09 6976.77,5807.09 cw(c6976.77,5707.09) 7076.77,5707.09 7076.77,5159.06 ccw(c7176.77,5159.06) 7176.77,5059.06 7370.47,5059.06 ccw(c7370.47,5159.06) 7470.47,5159.06 7470.47,5167.32 cw(c7559.06,5167.32) 7559.06,5255.91 ccw(c7559.06,5314.96) 7618.11,5314.96
GND on Bottom Layer "Top Layer-No Net" (solid, pour order 464): 7559.06,3239.76 cw(c7459.06,3239.76) 7459.06,3139.76 6566.54,3139.76 cw(c6566.54,3239.76) 6466.54,3239.76 6466.54,3267.72 6466.54,4143.48 6466.54,4516.14 cw(c6566.54,4516.14) 6566.54,4616.14 7913.39,4616.14 cw(c7913.39,4547.24) 7982.28,4547.24 7982.28,4509.45 cw(c7882.28,4509.45) 7882.28,4409.45 7608.27,4409.45 ccw(c7608.27,4360.24) 7559.06,4360.24

## Silkscreen, mask and mechanical layers (free items; w line width, h text height)
Top Overlay:
  text "GND" at 9714.57,9458.66 h60
  text "48V" at 7992.13,9429.13 h60
  text "5V" at 9427.17,8549.21 h60
  text "HIGH" at 8592.52,8257.87 h60 r90
  text "12V" at 9437.99,7784.45 h60
  text "MID" at 8602.36,7657.48 h60 r90
  text "LOW" at 8612.2,7017.72 h60 r90
  text "HIGH" at 2215.55,6000 h60
  text "If connector is used: / ensure S1 is fully off." at 13160,5980 h60
  text "HIGH" at 6673.23,5954.72 h60
  text "HIGH" at 11032.48,5935.04 h60
  text "AC" at 10135.83,3725.39 h60
  text "AC" at 5859.25,3650.59 h60
  text "AC" at 1338.58,3536.42 h60
  text "MID" at 2647.64,3533.46 h60
  text "MID" at 11505.91,3523.62 h60
  text "MID" at 7155.51,3503.94 h60
  text "LOW" at 6269.69,1732.28 h60
  text "LOW" at 1683.07,1663.39 h60
  text "LOW" at 10630.91,1529.53 h60